# Altium PCB Schaltbox-Renault.PcbDoc
Units mm, origin at the board's own origin, x right, y up, seen from the top; angles counter-clockwise.
Board outline 189.6 x 139.6 mm, 2 copper layers (Top Layer, Bottom Layer); 114 components, 182 nets, 540 pads, 41 vias.
Unrouted connection lines stored in the file: 57.
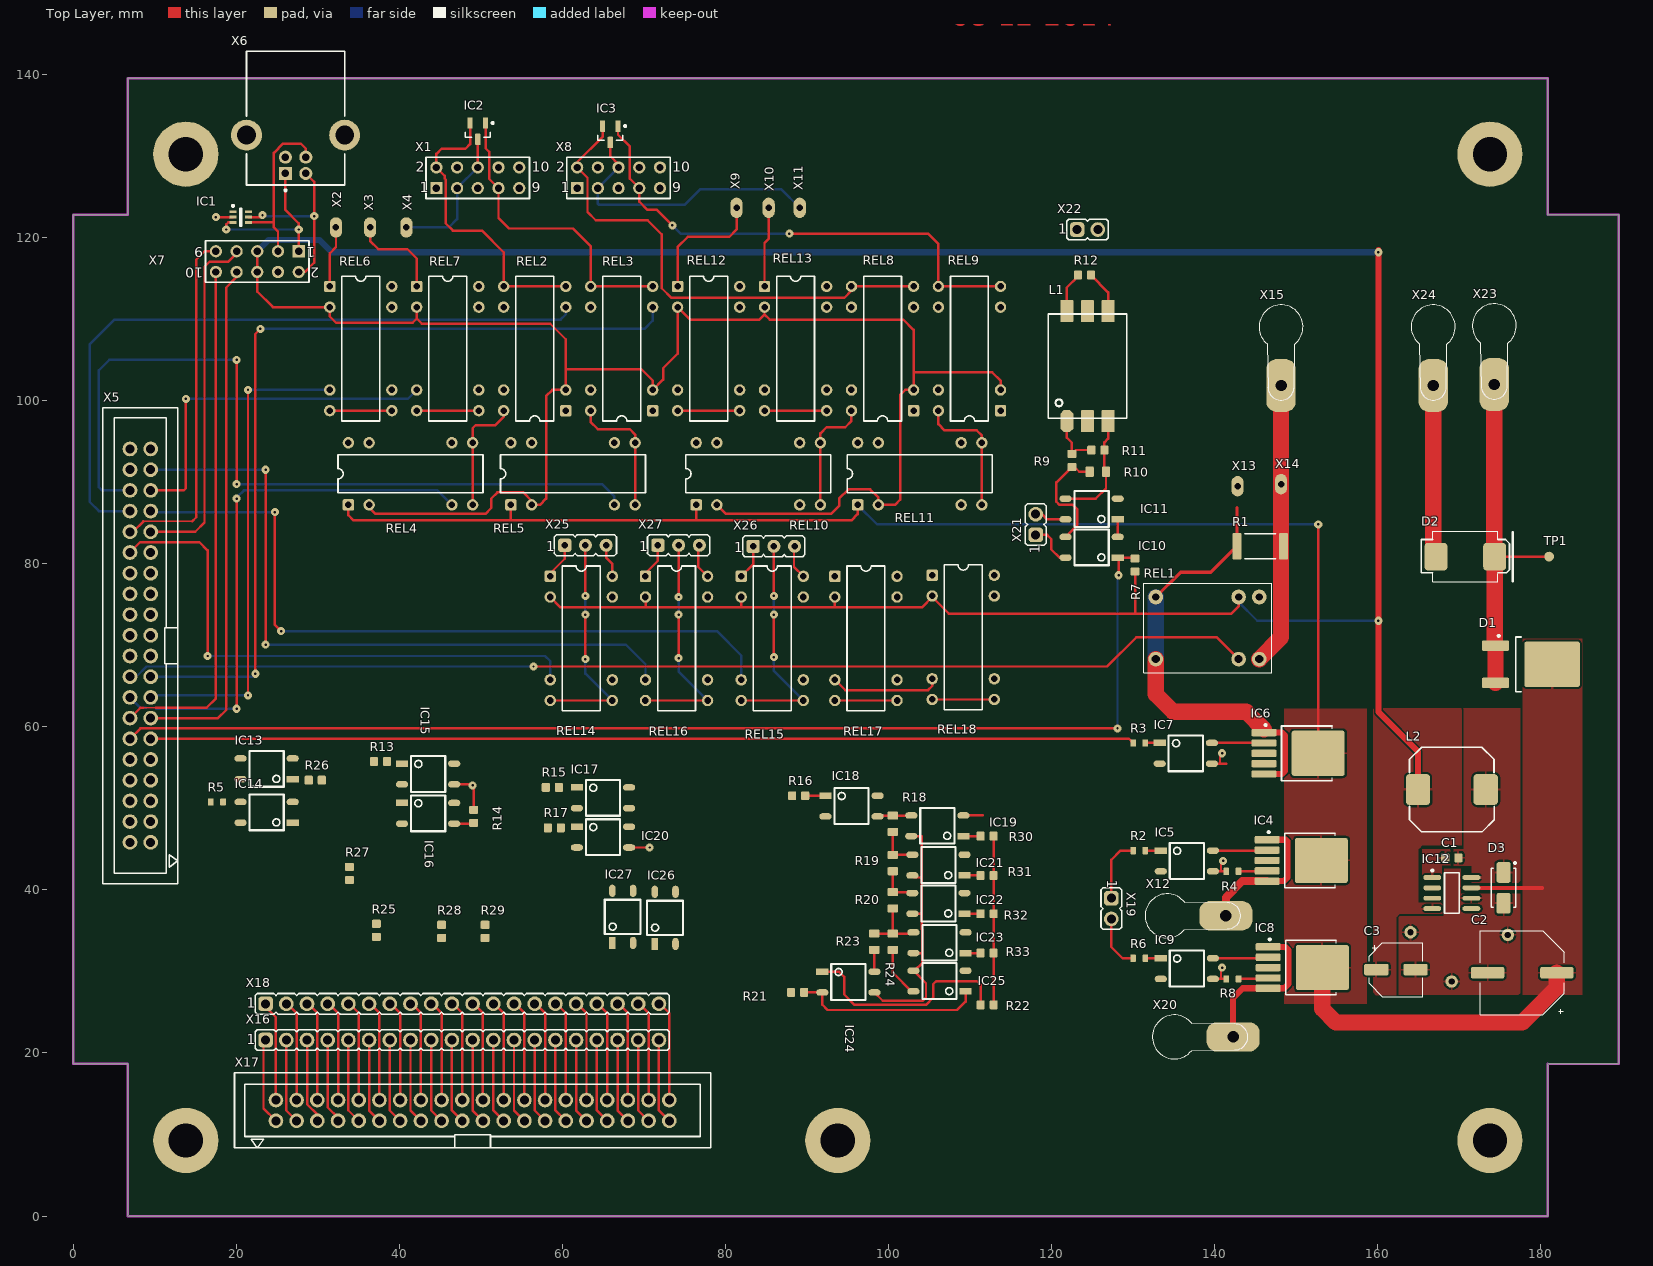
[diagram p0: Top Layer view]
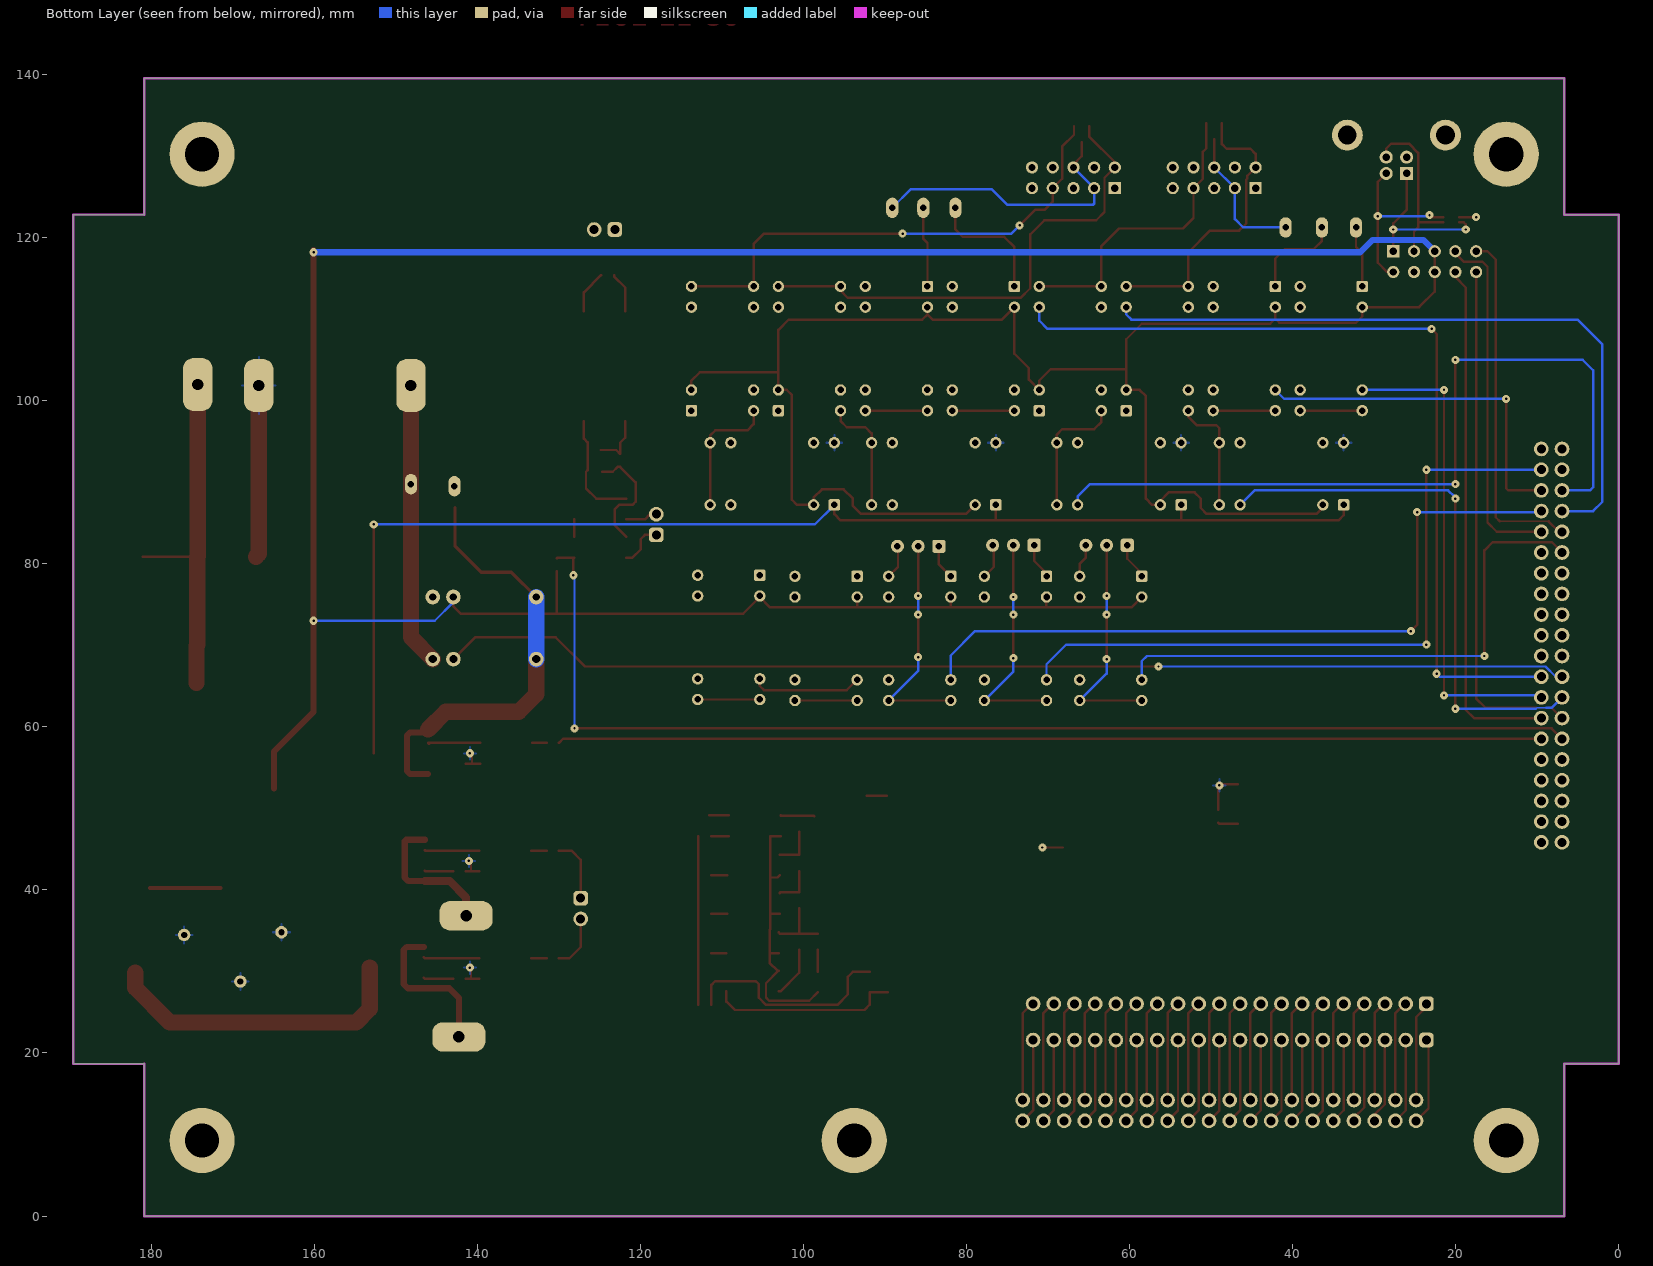
[diagram p1: Bottom Layer view, seen from below]
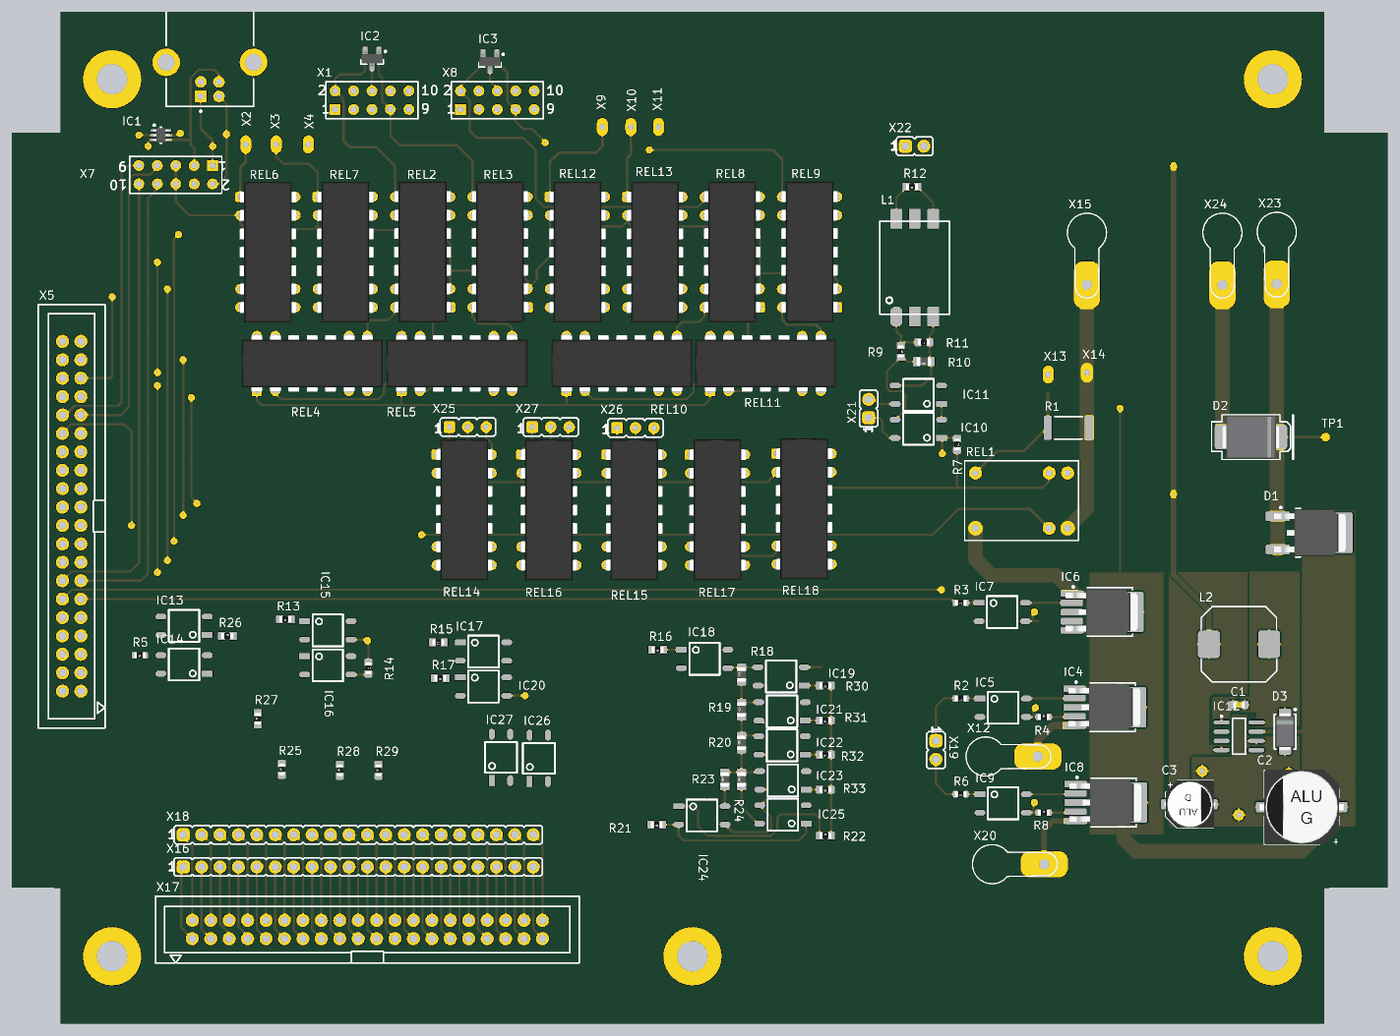
[diagram p2: 3D render of the assembled board from above, using the file's embedded part models]

## Layer stack, top to bottom
Top Solder: solder mask 0.0102, Solder Resist, Dk 3.5
Top Layer: signal copper 0.0356
Dielectric 1: dielectric 0.32, FR-4, Dk 4.8
Bottom Layer: signal copper 0.0356
Bottom Solder: solder mask 0.0102, Solder Resist, Dk 3.5

## Board outline
0.033,18.67 0.033,122.87 6.733,122.87 6.733,139.57 180.933,139.57 180.933,122.87 189.633,122.87 189.633,18.669 180.933,18.669 180.933,-0.03 6.733,-0.03 6.733,18.67

## Design rules (kind name [scope] priority, off if disabled: settings)
Clearance [All] p1: gap=0.2
PolygonConnect [All] p1: connectstyle=Relief reliefconductorwidth=0.254 reliefentries=4 polygonreliefangle="90 Angle" airgapwidth=0.254
RoutingVias [All] p1: holewidth=0.711 width=1.27 viastyle="Through Hole" minholewidth=0.711 minwidth=1.27 maxholewidth=0.711 maxwidth=1.27
SolderMaskExpansion [All] p1: expansion=0.102
Width [All] p1: maxlimit=2 minlimit=0.2 preferedwidth=0.3
29 further rules are at their usual default settings.

## Components (designator, comment, footprint, x,y, rotation, side; value= is the part's Value field where it differs from the comment)
C1 "10nF" C0603MD 169.164,43.942 r180 top
C2 "100µF / 63V" ALU-G 177.8,29.845 r0 top
C3 "68µF/16V Low ESW" ALU-D 162.306,30.226 r180 top
D1 "VS-MURB2020CTPBF" TO252-3_LD_(DPAK) 179.07,67.691 r0 top
D2 "SMCJ36A" SMC_MD_(DO214AB) 170.815,80.899 r0 top
D3 "10MQ060N" SMA_LD_(DO214AC) 175.514,40.259 r270 top
IC1 "PESD5V0L5UY" "SOT363_MD_(SC88 / SC70-6)" 20.574,122.555 r0 top
IC2 "PESD2CAN" SOT23_MD 49.657,133.096 r270 top
IC3 "PESD2CAN" SOT23_MD 65.913,132.715 r270 top
IC4 "BTS 433 P" TO252-5_MD_(DPAK) 150.749,43.624 r0 top
IC5 "ASSR-1410" SO-4 136.652,43.561 r0 top
IC6 "BTS 433 P" TO252-5_MD_(DPAK) 150.368,56.769 r0 top
IC7 "ASSR-1410" SO-4 136.525,56.769 r0 top
IC8 "BTS 433 P" TO252-5_MD_(DPAK) 150.876,30.48 r0 top
IC9 "ASSR-1410" SO-4 136.652,30.353 r0 top
IC10 "ASSR-1410" SO-4 124.968,82.042 r180 top
IC11 "ASSR-1410" SO-4 124.968,86.741 r180 top
IC12 "LM2672M-5.0" M08A_N 169.164,39.624 r0 top
IC13 "ASSR-1410" SO-4 23.749,54.864 r180 top
IC14 "ASSR-1410" SO-4 23.749,49.53 r180 top
IC15 "ASSR-1410" SO-4 43.561,54.229 r0 top
IC16 "ASSR-1410" SO-4 43.561,49.403 r0 top
IC17 "ASSR-1410" SO-4 65.024,51.308 r0 top
IC18 "ASSR-1410" SO-4 95.504,50.292 r0 top
IC19 "ASSR-1410" SO-4 106.045,47.879 r180 top
IC20 "ASSR-1410" SO-4 65.024,46.482 r0 top
IC21 "ASSR-1410" SO-4 106.172,43.053 r180 top
IC22 "ASSR-1410" SO-4 106.172,38.354 r180 top
IC23 "ASSR-1410" SO-4 106.299,33.528 r180 top
IC24 "ASSR-1410" SO-4 95.123,28.702 r0 top
IC25 "ASSR-1410" SO-4 106.299,28.829 r180 top
IC26 "ASSR-1410" SO-4 72.644,36.576 r90 top
IC27 "ASSR-1410" SO-4 67.437,36.703 r90 top
L1 "Uebertrager" SM-LP 124.46,104.267 r90 top
L2 "47uH" L_B82464-G4 169.164,52.324 r180 top
R1 "1R" R2512HD 145.669,82.169 r180 top
R2 "330R" R0603HD 130.81,44.831 r180 top
R3 "330R" R0603HD 130.81,58.039 r180 top
R4 "1k" R0603HD 142.24,42.291 r0 top
R5 "1k" R0603HD 17.653,50.8 r180 top
R6 "330R" R0603HD 130.81,31.623 r180 top
R7 "240R" R0603MD 130.302,79.883 r270 top
R8 "1k" R0603HD 142.24,29.083 r0 top
R9 "100R" R0603MD 122.555,92.71 r270 top
R10 "22R" R0805MD 125.73,91.313 r180 top
R11 "10R" R0603MD 125.73,93.98 r180 top
R12 "5k6" R0603MD 124.079,115.443 r180 top
R13 "330R" R0603MD 37.719,55.753 r180 top
R14 "1k5" R0603MD 49.149,49.022 r270 top
R15 "330R" R0603MD 58.801,52.578 r180 top
R16 "330R" R0603MD 89.027,51.562 r180 top
R17 "330R" R0603MD 59.055,47.625 r180 top
R18 "90R9" R0805MD 100.584,48.133 r90 top
R19 "110R" R0805MD 100.584,43.307 r90 top
R20 "185R" R0805MD 100.584,38.735 r90 top
R21 "330R" R0603MD 88.9,27.432 r180 top
R22 "330R" R0603MD 112.141,25.908 r0 top
R23 "10k85" R0805MD 98.298,33.655 r90 top
R24 "549R" R0805MD 100.584,33.655 r90 top
R25 "330R" R0603MD 37.211,35.052 r90 top
R26 "330R" R0603MD 29.718,53.467 r0 top
R27 "330R" R0603MD 33.909,42.037 r90 top
R28 "330R" R0603MD 45.212,34.925 r90 top
R29 "330R" R0603MD 50.546,34.925 r90 top
R30 "330R" R0603MD 112.141,46.609 r180 top
R31 "330R" R0603MD 112.141,41.783 r180 top
R32 "330R" R0603MD 112.141,37.084 r180 top
R33 "330R" R0603MD 112.141,32.258 r180 top
REL1 "Relay-HFD41" REL_HFD41 139.192,72.136 r0 top
REL2 "Relay-HE721" "DIP14 - HE700" 56.642,106.426 r180 top
REL3 "Relay-HE721" "DIP14 - HE700" 67.31,106.426 r180 top
REL4 "Relay-HE721" "DIP14 - HE700" 41.402,91.059 r90 top
REL5 "Relay-HE721" "DIP14 - HE700" 61.341,91.059 r90 top
REL6 "Relay-HE721" "DIP14 - HE700" 35.306,106.426 r0 top
REL7 "Relay-HE721" "DIP14 - HE700" 45.974,106.426 r0 top
REL8 "Relay-HE721" "DIP14 - HE700" 99.314,106.426 r180 top
REL9 "Relay-HE721" "DIP14 - HE700" 109.982,106.426 r180 top
REL10 "Relay-HE721" "DIP14 - HE700" 84.074,91.059 r90 top
REL11 "Relay-HE721" "DIP14 - HE700" 103.886,91.059 r90 top
REL12 "Relay-HE721" "DIP14 - HE700" 77.978,106.426 r0 top
REL13 "Relay-HE721" "DIP14 - HE700" 88.646,106.426 r0 top
REL14 "Relay-HE721" "DIP14 - HE700" 62.357,70.866 r0 top
REL15 "Relay-HE721" "DIP14 - HE700" 85.788,70.866 r0 top
REL16 "Relay-HE721" "DIP14 - HE700" 74.041,70.866 r0 top
REL17 "Relay-HE721" "DIP14 - HE700" 97.282,70.866 r0 top
REL18 "Relay-HE721" "DIP14 - HE700" 109.22,70.993 r0 top
TP1 "Testpoint" TESTPAD-1.2mm 181.102,80.899 r90 top
X1 "CAN Out 1" HDR2X5 44.577,126.111 r0 top
X2 "Anschlusspin" Loetpad_Oval_0.8 32.258,121.285 r90 top
X3 "Anschlusspin" Loetpad_Oval_0.8 36.449,121.285 r90 top
X4 "Anschlusspin" Loetpad_Oval_0.8 40.894,121.285 r90 top
X5 "PC I/O" SchneidKlemm_40 8.255,69.977 r90 top
X6 "USB-Hub in" USB_TypB 27.305,128.905 r90 top
X7 "USB_Hub Int" HDR2X5 27.686,118.364 r180 top
X8 "CAN Out 2" HDR2X5 61.849,126.111 r0 top
X9 "Anschlusspin" Loetpad_Oval_0.8 81.407,123.698 r270 top
X10 "Anschlusspin" Loetpad_Oval_0.8 85.344,123.698 r270 top
X11 "Anschlusspin" Loetpad_Oval_0.8 89.154,123.698 r270 top
X12 "UBout2" Loetoese-3.2 134.239,36.83 r0 top
X13 "I-" Loetpad_Oval_0.8 142.875,89.535 r270 top
X14 "I+" Loetpad_Oval_0.8 148.209,89.789 r270 top
X15 "KL 30" Loetoese-3.2 148.209,109.093 r270 top
X16 "Stifte 1x20" Stifte_1x20 47.752,21.59 r0 top
X17 "Cluster I/O" SchneidKlemm_40 49.022,12.954 r0 top
X18 "Stifte 1x20" Stifte_1x20 47.752,26.035 r0 top
X19 "UB Switch" Stifte_1x2 127.381,37.719 r270 top
X20 "UBout3" Loetoese-3.2 135.128,21.971 r0 top
X21 "LP in" Stifte_1x2 118.11,84.836 r90 top
X22 "Line Out" Stifte_1x2 124.46,121.031 r0 top
X23 "Vin" Loetoese-3.2 174.371,109.22 r270 top
X24 "GND" Loetoese-3.2 166.878,109.093 r270 top
X25 "Jumper-3" Buchse_1x3 62.865,82.296 r0 top
X26 "Jumper-3" Buchse_1x3 85.979,82.169 r0 top
X27 "Jumper-3" Buchse_1x3 74.295,82.296 r0 top

## Footprints (in the part's own frame and the unit in brackets; to place one, negate y for a bottom-side part, rotate by r counter-clockwise, add the part's x,y. Pads: shape width x height; smd on the part's side, far side on the other; paste and mask are expansions set on the pad)
ALU-D [mm] "Elko, Housing D,  body 6.6mm x 6.6mm, pad 3.0mm x 1.4mm"
  rrect30% 3x1.4 smd: N(-2.4,0) P(2.4,0)
  silkscreen extent -3.3,-3.3 3.3,3.3, body extent -3.6,-3.3 3.4,3.3, height 5.4
ALU-G [mm] "Elko, Housing G,  body 10.3mm x 10.3mm, d = 10mm"
  rrect30% 4.1x1.4 smd: N(-4.25,0) P(4.25,0)
  silkscreen extent -5.15,-5.15 5.15,5.15, body extent -5.8,-5.15 5.8,5.15, height 10.2
Buchse_1x3 [mm] "Buchsenleiste 3polig, RM2.54"
  rrect30% 1.6x1.6 hole 0.8: 1(-2.54,0)
  round 1.6 hole 0.8: 2(0,0) 3(2.54,0)
  silkscreen extent -3.81,-1.27 3.81,1.27, body extent -3.81,-1.27 3.81,1.27, height 7.2
C0603MD [mm] "Chip Capacitor, Body 1.6x0.8mm, IPC Medium Density"
  rrect30% 1x1.1 smd: 1(-0.8,0) 2(0.8,0)
  body extent -0.8,-0.4 0.8,0.4, height 0.3
"DIP14 - HE700" [mm] "Hamlin-HE700 DIL14"
  rrect30% 1.4x1.4 hole 0.8: 1(-3.81,7.62)
  round 1.4 hole 0.8: 2(-3.81,5.08) 6(-3.81,-5.08) 7(-3.81,-7.62) 8(3.81,-7.62) 9(3.81,-5.08) 13(3.81,5.08) 14(3.81,7.62)
  silkscreen extent -2.32,-8.89 2.33,8.89, body extent -3.9,-9.73 3.92,9.7, height 4.57
HDR2X5 [mm] "Connector; Header; 5x2 Position"
  rect 1.5x1.5 hole 0.9: 1(0,0)
  round 1.5 hole 0.9: 2(0,2.54) 3(2.54,0) 4(2.54,2.54) 5(5.08,0) 6(5.08,2.54) 7(7.62,0) 8(7.62,2.54) 9(10.16,0) 10(10.16,2.54)
  silkscreen extent -1.27,-1.27 11.43,3.81
L_B82464-G4 [mm] "Inductor EPCOS , Body 10.4x10.4mm, B82464-G4"
  rrect30% 3x3.8 smd: 1(-4.15,0) 2(4.15,0)
  silkscreen extent -5.2,-5.2 5.2,5.2, body extent -2.85,-2.5 2.85,2.5, height 4.8
Loetoese-3.2 [mm] "Lötöse M3"
  rrect70% 6.5x3.6 hole 1.4: 1(7.2,0)
  silkscreen extent -2.7,-2.7 9,2.7
Loetpad_Oval_0.8 [mm] "Lötpad oval 2.5x1.5, Bohrung o.8mm"
  oval 2.5x1.5 hole 0.8: 1(0,0)
M08A_N [mm] "SOIC, 8-Leads, Body 4.9x3.9mm, Pitch 1.27mm, IPC Medium Density"
  oval 2.2x0.6 smd: 1(-2.4,1.905) 2(-2.4,0.635) 3(-2.4,-0.635) 4(-2.4,-1.905) 5(2.4,-1.905) 6(2.4,-0.635) 7(2.4,0.635) 8(2.4,1.905)
  silkscreen extent -2.52,-2.5 0.9,2.88, body extent -2,-2.5 2,2.5, height 1.75
R0603HD [mm] "Chip Resistor, Body 1.6x0.8mm, IPC High Density"
  rrect30% 0.7x0.9 smd: 1(-0.75,0) 2(0.75,0)
  body extent -0.8,-0.4 0.8,0.4, height 0.3
R0603MD [mm] "Chip Resistor, Body 1.6x0.8mm, IPC High Density"
  rrect30% 1x1.1 smd: 1(-0.8,0) 2(0.8,0)
  body extent -0.8,-0.4 0.8,0.4, height 0.3
R0805MD [mm] "Chip Resistor, Body 2.0x1.3mm, IPC Medium Density"
  rrect30% 1x1.3 smd: 1(-1,0) 2(1,0)
  body extent -1,-0.62 1,0.63, height 0.78
R2512HD [mm] "Chip Resistor, Body 6.3x3.2mm, IPC High Density"
  rrect30% 1.1x3.3 smd: 1(-2.85,0) 2(2.85,0)
  silkscreen extent -1.9,-1.55 1.9,1.55, body extent -3.22,-1.68 3.22,1.68, height 0.71
REL_HFD41 [mm] "Relay HFD41-Serie, DPDT"
  round 1.8 hole 1: 1(-6.35,-3.81) 3(3.81,-3.81) 4(6.35,-3.81)
  round 1.8 hole 0.9: 5(6.35,3.81) 6(3.81,3.81) 8(-6.35,3.81)
  silkscreen extent -7.85,-5.5 7.85,5.5, body extent -7.85,-5.53 7.83,5.5, height 12
SchneidKlemm_40 [mm] "Schneid-Klemmsteckverbinder, 40pol. RM2.54"
  round 1.8 hole 1.1: 1(-24.13,-1.27) 2(-24.13,1.27) 3(-21.59,-1.27) 4(-21.59,1.27) 5(-19.05,-1.27) 6(-19.05,1.27) 7(-16.51,-1.27) 8(-16.51,1.27) 9(-13.97,-1.27) 10(-13.97,1.27) 11(-11.43,-1.27) 12(-11.43,1.27) 13(-8.89,-1.27) 14(-8.89,1.27) 15(-6.35,-1.27) 16(-6.35,1.27) 17(-3.81,-1.27) 18(-3.81,1.27) 19(-1.27,-1.27) 20(-1.27,1.27) 21(1.27,-1.27) 22(1.27,1.27) 23(3.81,-1.27) 24(3.81,1.27) 25(6.35,-1.27) 26(6.35,1.27) 27(8.89,-1.27) 28(8.89,1.27) 29(11.43,-1.27) 30(11.43,1.27) 31(13.97,-1.27) 32(13.97,1.27) 33(16.51,-1.27) 34(16.51,1.27) 35(19.05,-1.27) 36(19.05,1.27) 37(21.59,-1.27) 38(21.59,1.27) 39(24.13,-1.27) 40(24.13,1.27)
  silkscreen extent -29.21,-4.6 29.21,4.6
SM-LP [mm] "SM-LP-5001 Series -Surface Mount Line Matching Transformers"
  oct 2.7x1.6 smd: 1(-6.75,2.54)
  rrect10% 2.7x1.6 smd: 2(-6.75,0) 3(-6.75,-2.54) 4(6.75,-2.54) 5(6.75,0) 6(6.75,2.54)
  silkscreen extent -6.4,-4.8 6.4,4.8, body extent -6.4,-4.8 6.4,4.8, height 7.46
SMA_LD_(DO214AC) [mm] "Molded Diode, 2-Leads, Body 4,4x2,7mm, IPC Low Density"
  rrect30% 2.55x1.7 smd: 1(-1.9,0) 2(1.9,0)
  silkscreen extent -3.17,-1.5 2.4,1.53, body extent -2.6,-1.47 2.6,1.48, height 2.7
SMC_MD_(DO214AB) [mm] "DO-214-AB/SMC; 2 C-Bend Leads; Body 7.15 x 6.25mm"
  rrect30% 2.8x3.4 smd: 1(3.6,0) 2(-3.6,0)
  silkscreen extent -5.43,-3.1 5.8,3.1, body extent -3.98,-2.95 3.98,2.95, height 2.3
SO-4 [mm]
  rect 1.5x0.8 smd: 1(-3.2,1.27)
  oval 1.5x0.8 smd: 2(-3.2,-1.27) 3(3.2,-1.27) 4(3.2,1.27)
  silkscreen extent -2.1,-2.2 2.1,2.2, body extent -3.36,-2.2 3.36,2.2, height 3
SOT23_MD [mm] "SOT23, 3-Leads, Body 3,1x2,6mm (max), Pitch 0,95mm, IPC Medium Density"
  rrect30% 1.4x0.65 smd: 1(-1,0.95) 2(-1,-0.95) 3(1,0)
  silkscreen extent -1.12,-1.55 0.75,1.95, body extent -1.25,-1.56 1.23,1.56, height 1.3
"SOT363_MD_(SC88 / SC70-6)" [mm] "SOT323, 6-Leads, Body 2,2x2,4mm (max), Pitch 0,65mm, IPC Medium Density"
  rrect30% 0.9x0.35 smd: 1(-0.95,0.65) 2(-0.95,0) 3(-0.95,-0.65) 4(0.95,-0.65) 5(0.95,0) 6(0.95,0.65)
  silkscreen extent -1.07,-1.1 0.1,1.5, body extent -1.05,-1.1 1.05,1.1, height 1.1
Stifte_1x2 [mm] "Stiftleiste 2polig, RM2.54"
  rrect50% 1.8x1.8 hole 1.1: 1(-1.27,0)
  round 1.8 hole 1.1: 2(1.27,0)
  silkscreen extent -2.54,-1.27 2.54,1.27, body extent -2.54,-1.27 2.54,1.27, height 8.6
Stifte_1x20 [mm] "Stiftleiste 20polig, RM2.54"
  rrect50% 1.8x1.8 hole 1.1: 1(-24.13,0)
  round 1.8 hole 1.1: 2(-21.59,0) 3(-19.05,0) 4(-16.51,0) 5(-13.97,0) 6(-11.43,0) 7(-8.89,0) 8(-6.35,0) 9(-3.81,0) 10(-1.27,0) 11(1.27,0) 12(3.81,0) 13(6.35,0) 14(8.89,0) 15(11.43,0) 16(13.97,0) 17(16.51,0) 18(19.05,0) 19(21.59,0) 20(24.13,0)
  silkscreen extent -25.4,-1.27 25.4,1.27, body extent -25.4,-1.27 25.4,1.27, height 8.6
TESTPAD-1.2mm [mm] "Testpad 1.2mm"
  round 1.2 smd paste-2: 1(0,0)
TO252-3_LD_(DPAK) [mm] "TO252, IPC Low Density"
  rrect30% 3.35x1.3 smd: 1(-4.55,2.29) 3(-4.55,-2.29)
  rrect10% 6.8x5.6 smd: 4(2.4,0)
  silkscreen extent -4.27,-3.35 -1.4,3.61, body extent -5.1,-3.27 4.84,3.27, height 2.41
TO252-5_MD_(DPAK) [mm] "TO252, IPC Medium Density"
  rrect30% 3.05x0.9 smd: 1(-4.25,2.54) 2(-4.25,1.27) 3(-4.25,-0.005) 4(-4.25,-1.27) 5(-4.25,-2.54)
  rrect10% 6.5x5.55 smd: T(2.4,0)
  silkscreen extent -4.17,-3.35 4.13,3.59, body extent -5.1,-3.27 4.84,3.27, height 2.41
USB_TypB [mm] "Connector; USB2, Type B, Thru-Hole; 4 Position; Right Angle"
  round 3.8 hole 2.3: B1(3.71,6.02) B2(3.71,-6.02)
  round 1.6 hole 0.92: D+(1,-1.25) D-(-1,-1.25) GND(1,1.25)
  rect 1.6x1.6 hole 0.92: VBUS(-1,1.25)
  silkscreen extent -3.18,-6.02 13.99,6.02, body extent -2.41,-6.02 13.99,6.02, height 11.1

## Part data
C1: library part Cap, "Capacitor"
C2 C3: library part "Cap Pol", "Capacitor Polarized"
D1: library part MURD620CT, "Schottky Barrier Double Diode"
D2: "Suppressor Diode, unidirektional, 36V, 1500 W, fFotprint SMC"
D3: library part 10MQ060NPbF, "Schotky Diode 2,1A 60V, footprint SMA"
IC1: "ESD_Protection 5 Lines"
IC2 IC3: "ESD-Protection CAN-Bus"
IC4 IC6 IC8: library part "BTS443 P"
IC5 IC7 IC9 IC10 IC11 IC13 IC14 IC15 IC16 IC17 IC18 IC19 IC20 IC21 IC22 IC23 IC24 IC25 IC26 IC27: "Solid State Relay, (Photo MOSFET)"
IC12: "SIMPLE SWITCHER® Power Converter High Efficiency 1A Step-Down Voltage Regulator with Features, 8-pin Narrow SOIC"
L1: "SM-LP-5001 Series -Surface Mount Line Matching Transformers"
L2: library part Inductor, "Inductor"
R1 R2 R3 R4 R5 R6 R7 R8 R9 R10 R11 R12 R13 R14 R15 R16 R17 R18 R19 R20 R21 R22 R23 R24 R25 R26 R27 R28 R29 R30 R31 R32 R33: library part Res, "Resistor"
REL1: "Relay Hongfa Typ HFD41, SPDT, 2A/ 250VAC/30VDC"
REL2 REL3 REL4 REL5 REL6 REL7 REL8 REL9 REL10 REL11 REL12 REL13 REL14 REL15 REL16 REL17 REL18: "Hamlin Reed-Relay SPDT"
X1 X7 X8: library part "Header 5X2", "Header, 5-Pin, Dual row"
X2 X3 X4 X9 X10 X11: "Anschluss, Bohrung 1.2mm"
X5 X17: library part CON-40pol, "Schneid-Klemm-Verbinder 40pol"
X6: library part "USB-Typ AB", "USB-Stecker-Typ A und B,THT"
X12 X13 X14 X15 X20 X23 X24: library part Anschlusspin, "Anschluss, Bohrung 1.2mm"
X16 X18: "Stiftleiste, Buchsenleiste"
X19 X21 X22: library part Jumper-2, "2pol Jumper RM 2.54"
X25 X26 X27: "3pol Jumper RM 2.54"

## Free pads (board coordinates)
  round 8 hole 4.2: 0(13.833,9.27) 0(13.833,130.27) 0(93.833,9.27) 0(173.833,9.27) 0(173.833,130.27)
  round 1.524 hole 0.762: 0(164.092,34.815) 1(176.03,34.484) 2(169.147,28.769)

## Via types
v1: diameter 1, hole 0.3, Top Layer to Bottom Layer, 41 vias

## Nets (pads, with @x,y where several pads share a name; then routed paths per layer and width w, separated by ;. In a path a pad name is that pad's centre, name@x,y a point inside that pad or via, vN(x,y) a via of type N, cw(c..) or ccw(c..) an arc to the next point about the centre after c; other vN are vias at no path point)
+ADAC: IC18.4
-ADAC: IC19.4 IC21.4 IC22.4 IC23.4 IC24.3 IC25.3 | length 32.9
  Top Layer w0.3: IC24.3 99.339,26.416 104.267,26.416 104.648,26.797 104.648,28.55 IC25.3 103.242,30.099 104.199,31.056 104.199,32.131 ; IC19.4 104.14,46.609 104.14,41.529 ; IC22.4 104.013,37.084 104.14,36.957 ; IC21.4 103.226,41.529 104.14,41.529 ; IC23.4 104.072,32.258 104.199,32.131 ; 104.14,36.957 104.14,35.168 104.199,35.109 104.199,32.131 ; 104.14,36.957 104.14,41.529
ADAC: IC18.1 R16.1 | length 2.5
  Top Layer w0.3: R16.1 IC18.1
ADAC_E: IC24.2 IC25.1 R21.1 | length 23.2
  Top Layer w0.3: R21.1 IC24.2 91.923,25.933 92.583,25.273 108.458,25.273 109.499,26.314 IC25.1
BILD_BOX: REL15.6 X5.33 | length 91.1
  Top Layer w0.3: v1(24.765,86.36) 24.765,72.517 v1(25.527,71.755)
  Bottom Layer w0.3: X5.33 9.652,86.36 v1(24.765,86.36) ; v1@25.273,71.755 v1(25.527,71.755) 78.994,71.755 81.978,68.77 REL15.6
CAN1GND: IC2.3 X1.3 X1.6 X4.1 | length 17.5
  Top Layer w0.3: X1.6 IC2.3
  Bottom Layer w0.3: X4.1 46.101,121.285 47.117,122.301 X1.3 X1.6
CAN2GND: IC3.3 X8.3 X8.6 X11.1 | length 35.5
  Top Layer w0.3: IC3.3 65.913,130.048 66.929,129.032 X8.6
  Bottom Layer w0.3: X8.6 X8.3 64.389,124.206 64.516,124.079 75.057,124.079 76.962,125.984 86.868,125.984 X11.1
CANH1: REL7.1 X3.1 | length 11.7
  Top Layer w0.3: X3.1 36.449,119.634 37.465,118.618 41.021,118.618 42.164,117.475 REL7.1
CANH1-BREAK: REL7.6 X5.35 | length 44.3
  Top Layer w0.3: X5.35 13.589,89.027 13.843,89.281 v1(13.843,100.242)
  Bottom Layer w0.3: v1@13.755,100.242 v1(13.843,100.242) 41.06,100.242 REL7.6
CANH1-GND: REL5.6 X5.36 | length 99
  Top Layer w0.3: v1(20.066,89.789) v1(20.066,105.029)
  Bottom Layer w0.3: X5.36 3.556,89.027 3.175,89.408 3.175,103.759 4.445,105.029 v1(20.066,105.029) ; v1(20.066,89.789) 64.897,89.789 66.421,88.265 REL5.6
CANH1-OUT: IC2.1 REL3.7 REL3.8 X1.7 | length 37.6
  Top Layer w0.3: IC2.1 50.607,131.003 51.043,130.567 51.043,128.162 51.054,128.151 51.054,127.254 X1.7 52.197,122.428 53.467,121.158 61.341,121.158 63.5,118.999 REL3.8 REL3.7
CANH1-TO: REL3.6 X5.17 | length 106
  Top Layer w0.3: v1(22.367,66.533) 22.367,101.72 22.352,101.735 22.352,108.204 v1(22.987,108.839)
  Bottom Layer w0.3: X5.17 22.001,66.167 v1(22.367,66.533) ; v1@22.733,108.839 v1(22.987,108.839) 70.104,108.839 71.12,109.855 REL3.6
CANH2: REL13.1 X10.1 | length 9.9
  Top Layer w0.3: REL13.1 84.836,119.38 85.344,119.888 X10.1
CANH2-BREAK: REL13.6
CANH2-GND: REL11.6
CANH2-OUT: IC3.1 REL9.7 REL9.8 X8.7 | length 62
  Top Layer w0.3: IC3.1 66.863,132.654 68.315,131.202 68.315,128.162 68.326,128.151 68.326,127.254 X8.7 69.469,124.46 70.485,123.444 71.628,123.444 v1(73.533,121.539) ; v1(87.884,120.523) 104.902,120.523 106.172,119.253 REL9.8 REL9.7
  Bottom Layer w0.3: v1(73.533,121.539) 74.549,120.523 v1(87.884,120.523)
CANH2-TO: REL9.6
CANL1: REL6.1 X2.1 | length 7.6
  Top Layer w0.3: REL6.1 31.496,118.11 32.258,118.872 X2.1
CANL1-BREAK: REL6.6 X5.15 | length 59.5
  Top Layer w0.3: v1(21.463,63.881) v1(21.463,101.346)
  Bottom Layer w0.3: X5.15 9.779,63.881 v1(21.463,63.881) ; v1(21.463,101.346) REL6.6
CANL1-GND: REL4.6 X5.16 | length 66.8
  Top Layer w0.3: v1(20.066,62.23) v1(20.066,88.011)
  Bottom Layer w0.2: 8.906,62.341 10.044,62.341 10.155,62.23 10.226,62.23
  Bottom Layer w0.3: X5.16 8.271,62.341 8.906,62.341 ; 10.226,62.23 v1(20.066,62.23) ; v1@20.193,88.265 20.955,89.027 44.704,89.027 REL4.6
CANL1-OUT: IC2.2 REL2.7 REL2.8 X1.2 | length 36.6
  Top Layer w0.3: IC2.2 48.707,131.511 48.133,130.937 45.212,130.937 44.577,130.302 X1.2 45.593,127.635 45.593,127.304 45.731,127.166 45.731,121.782 46.609,120.904 50.165,120.904 52.832,118.237 REL2.8 REL2.7
CANL1-TO: REL2.6 X5.34 | length 85.6
  Bottom Layer w0.3: X5.34 3.175,86.487 2.032,87.63 2.032,106.934 5.08,109.982 59.817,109.982 60.452,110.617 REL2.6
CANL2: REL12.1 X9.1 | length 15.6
  Top Layer w0.3: REL12.1 74.168,118.872 75.438,120.142 80.518,120.142 81.407,121.031 X9.1
CANL2-BREAK: REL12.6
CANL2-GND: REL10.6
CANL2-OUT: IC3.2 REL8.7 REL8.8 X8.2 | length 61.5
  Top Layer w0.3: IC3.2 64.963,132.4 61.849,129.286 X8.2 63.119,127.381 63.119,123.19 64.135,122.174 70.485,122.174 72.224,120.435 72.224,113.831 73.406,112.649 94.615,112.649 95.504,113.538 REL8.8 REL8.7
CANL2-TO: REL8.6
"CENTRONIX 1": X16.1 X17.1 | length 10.7
  Top Layer w0.3: X16.1@23.368,21.717 23.368,13.208 X17.1
"CENTRONIX 2": X17.2 X18.1 | length 12.6
  Top Layer w0.3: X18.1@23.368,26.162 23.368,25.908 24.892,24.384 X17.2
"CENTRONIX 3": X16.2 X17.3 | length 10.7
  Top Layer w0.3: X16.2@25.908,21.717 26.142,21.483 26.142,12.974 X17.3
"CENTRONIX 4": X17.4 X18.2 | length 12.5
  Top Layer w0.3: X18.2@26.162,26.162 27.432,24.892 X17.4
"CENTRONIX 5": X16.3 X17.5 | length 10.6
  Top Layer w0.3: X16.3@28.702,21.717 28.722,21.697 28.722,13.706 29.972,12.456 X17.5
"CENTRONIX 6": X17.6 X18.3 | length 12.5
  Top Layer w0.3: X18.3@28.702,26.162 29.972,24.892 X17.6
"CENTRONIX 7": X16.4 X17.7 | length 10.6
  Top Layer w0.3: X16.4@31.242,21.717 31.242,13.335 32.512,12.065 X17.7
"CENTRONIX 8": X17.8 X18.4 | length 12.5
  Top Layer w0.3: X18.4@31.242,26.162 32.512,24.892 X17.8
"CENTRONIX 9": X16.5 X17.9 | length 10.6
  Top Layer w0.3: X16.5@33.782,21.717 33.762,21.697 33.762,12.974 X17.9
"CENTRONIX 10": X17.10 X18.5 | length 12.5
  Top Layer w0.3: X18.5@33.782,26.162 35.052,24.892 X17.10
"CENTRONIX 11": X16.6 X17.11 | length 10.6
  Top Layer w0.3: X16.6@36.322,21.717 36.322,12.954 X17.11
"CENTRONIX 12": X17.12 X18.6 | length 12.5
  Top Layer w0.3: X18.6@36.322,26.162 37.592,24.892 X17.12
"CENTRONIX 13": X16.7 X17.13 | length 10.6
  Top Layer w0.3: X16.7@38.862,21.717 38.862,12.954 X17.13
"CENTRONIX 14": X17.14 X18.7 | length 12.5
  Top Layer w0.3: X18.7@38.862,26.162 40.132,24.892 X17.14
"CENTRONIX 15": X16.8 X17.15 | length 10.6
  Top Layer w0.3: X16.8@41.402,21.717 41.402,12.954 X17.15
"CENTRONIX 16": X17.16 X18.8 | length 12.5
  Top Layer w0.3: X18.8@41.402,26.162 42.672,24.892 X17.16
"CENTRONIX 17": X16.9 X17.17 | length 10.6
  Top Layer w0.3: X16.9@43.942,21.717 43.942,12.954 X17.17
"CENTRONIX 18": X17.18 X18.9 | length 12.5
  Top Layer w0.3: X18.9@43.942,26.162 45.212,24.892 X17.18
"CENTRONIX 19": X16.10 X17.19 | length 10.6
  Top Layer w0.3: X16.10@46.482,21.717 46.482,12.954 X17.19
"CENTRONIX 20": X17.20 X18.10 | length 12.5
  Top Layer w0.3: X18.10@46.482,26.162 47.752,24.892 X17.20
"CENTRONIX 21": X16.11 X17.21 | length 10.6
  Top Layer w0.3: X16.11@49.022,21.717 49.022,12.954 X17.21
"CENTRONIX 22": X17.22 X18.11 | length 12.5
  Top Layer w0.3: X18.11@49.022,26.162 50.292,24.892 X17.22
"CENTRONIX 23": X16.12 X17.23 | length 10.6
  Top Layer w0.3: X16.12@51.562,21.717 51.562,12.954 X17.23
"CENTRONIX 24": X17.24 X18.12 | length 12.5
  Top Layer w0.3: X18.12@51.562,26.162 52.832,24.892 X17.24
"CENTRONIX 25": X16.13 X17.25 | length 10.6
  Top Layer w0.3: X16.13@54.102,21.717 54.102,12.954 X17.25
"CENTRONIX 26": X17.26 X18.13 | length 12.5
  Top Layer w0.3: X18.13@54.102,26.162 55.372,24.892 X17.26
"CENTRONIX 27": X16.14 X17.27 | length 10.6
  Top Layer w0.3: X16.14@56.642,21.717 56.642,12.954 X17.27
"CENTRONIX 28": X17.28 X18.14 | length 12.5
  Top Layer w0.3: X18.14@56.642,26.162 57.912,24.892 X17.28
"CENTRONIX 29": X16.15 X17.29 | length 10.6
  Top Layer w0.3: X16.15@59.182,21.717 59.182,12.954 X17.29
"CENTRONIX 30": X17.30 X18.15 | length 12.5
  Top Layer w0.3: X18.15@59.182,26.162 60.452,24.892 X17.30
"CENTRONIX 31": X16.16 X17.31 | length 10.6
  Top Layer w0.3: X16.16@61.722,21.717 61.722,12.954 X17.31
"CENTRONIX 32": X17.32 X18.16 | length 12.5
  Top Layer w0.3: X18.16@61.722,26.162 62.992,24.892 X17.32
"CENTRONIX 33": X16.17 X17.33 | length 10.6
  Top Layer w0.3: X16.17@64.262,21.717 64.262,12.954 X17.33
"CENTRONIX 34": X17.34 X18.17 | length 12.5
  Top Layer w0.3: X18.17@64.262,26.162 65.532,24.892 X17.34
"CENTRONIX 35": X16.18 X17.35 | length 10.6
  Top Layer w0.3: X16.18@66.802,21.717 66.802,12.954 X17.35
"CENTRONIX 36": X17.36 X18.18 | length 12.5
  Top Layer w0.3: X18.18@66.802,26.162 68.072,24.892 X17.36
"CENTRONIX 37": X16.19 X17.37 | length 10.6
  Top Layer w0.3: X16.19@69.342,21.717 69.342,12.954 X17.37
"CENTRONIX 38": X17.38 X18.19 | length 12.5
  Top Layer w0.3: X18.19@69.342,26.162 70.612,24.892 X17.38
"CENTRONIX 39": X16.20 X17.39 | length 10.6
  Top Layer w0.3: X16.20@71.882,21.717 71.882,12.954 X17.39
"CENTRONIX 40": X17.40 X18.20 | length 12.5
  Top Layer w0.3: X18.20@71.882,26.162 73.152,24.892 X17.40
DAY/NIGHT: IC20.1 R17.1
DAY/NIGHT-NC: IC20.4
ECOM0: X5.9
ECOM1: X5.28
FLASH_REL: REL14.6 X5.30 | length 68
  Top Layer w0.3: X5.30 8.235,82.657 15.514,82.657 16.51,81.661 v1(16.51,68.707)
  Bottom Layer w0.3: v1(16.51,68.707) 57.912,68.707 58.547,68.072 REL14.6
GND: C2.N C3.N D2.2 D3.2 IC5.3 IC7.3 IC9.3 IC12.6 IC13.3 IC14.3 IC15.3 IC20.3 pad.0@164.092,34.815 pad.1 pad.2 R4.1 R5.1 R8.1 R14.1 REL4.14 REL5.14 REL10.14 REL11.14 X24.1 | length 37.7
  Top Layer w0.3: IC15.3 48.895,52.959 49.149,52.705 R14.1 ; IC20.3 v1(70.739,45.212) ; IC7.3 140.716,55.499 ; IC9.3 140.843,29.083 ; IC5.3 140.843,42.291 ; v1@140.716,56.769 140.716,55.499 ; v1@140.843,30.226 140.843,29.083 ; v1@140.843,43.561 140.843,42.291 ; R8.1 140.843,29.083 ; R4.1 140.843,42.291 ; 141.49,55.499 140.716,55.499
  Top Layer w2: X24.1@166.878,101.854 166.878,81.236 D2.2
  other v1: 140.97,30.48 141.097,43.561 49.022,52.832 140.97,56.769
"IDI 0": X5.1
"IDI 1": X5.20
"IDI 2": X5.2
"IDI 3": X5.21
"IDI 4": X5.3
"IDI 5": X5.22
"IDI 6": X5.4
"IDI 7": X5.23
"IDI 8": X5.5
"IDI 9": X5.24
"IDI 10": X5.6
"IDI 11": X5.25
"IDI 12": X5.7
"IDI 13": X5.26
"IDI 14": X5.8
"IDI 15": X5.27
"IDO 15": REL16.6 X5.37 | length 85.1
  Top Layer w0.3: v1(23.622,70.104) v1(23.622,91.567)
  Bottom Layer w0.3: X5.37 v1(23.622,91.567) ; v1(23.622,70.104) 67.818,70.104 70.231,67.691 REL16.6
"KL 30 ON": R3.2 X5.11 | length 120.7
  Top Layer w0.3: X5.11 129.552,58.547 R3.2
NetC1_1: C1.1 D3.1 IC12.8 L2.1
NetC1_2: C1.2 IC12.1
NetD1_1: D1.1 D1.3 D2.1 TP1.1 X23.1 | length 43.3
  Top Layer w0.3: D2.1 TP1.1
  Top Layer w2: X23.1@174.371,101.981 174.371,80.943 D2.1 174.415,70.086 D1.1 D1.3
NetIC1_4: IC1.4 X6.D+ X7.3 | length 21.1
  Top Layer w0.3: IC1.4 24.623,121.905 24.638,121.92 ; X7.3 25.146,120.777 24.638,121.285 24.638,121.92 ; X6.D+ 28.555,130.957 27.94,131.572 25.781,131.572 24.638,130.429 24.638,121.92
NetIC1_5: IC1.5 X6.D- X7.2 | length 22
  Top Layer w0.3: IC1.5 22.987,122.555 v1(23.241,122.809) ; X7.2 28.448,115.824 29.591,116.967 v1(29.591,122.682) 29.591,126.869 X6.D-
  Bottom Layer w0.3: v1(23.241,122.809) 23.368,122.682 v1(29.591,122.682)
NetIC4_2: IC4.2 IC5.4 | length 6.7
  Top Layer w0.3: IC5.4 146.435,44.831 IC4.2
NetIC4_4: IC4.4 R4.2 | length 3.5
  Top Layer w0.3: R4.2 146.436,42.291 IC4.4
NetIC5_1: IC5.1 R2.1 | length 1.9
  Top Layer w0.3: R2.1 IC5.1
NetIC6_1: IC6.1 IC6.5 R1.2 REL1.1 REL1.8 X13.1 | length 54.1
  Top Layer w0.4: REL1.8 135.89,78.994 139.573,78.994 142.819,82.24 142.819,86.924
  Top Layer w0.75: IC6.5 148.336,54.229 148.717,54.61 148.717,58.928 148.336,59.309 IC6.1
  Top Layer w2: REL1.1 132.842,64.008 135.001,61.849 143.958,61.849 IC6.1@146.118,59.689
  Bottom Layer w2: REL1.1 REL1.8
NetIC6_2: IC6.2 IC7.4 | length 6.6
  Top Layer w0.3: IC7.4 IC6.2 IC6.2@145.991,57.912
NetIC6_4: IC6.4 R5.2
NetIC7_1: IC7.1 R3.1 | length 1.8
  Top Layer w0.3: R3.1 IC7.1
NetIC8_2: IC8.2 IC9.4 | length 6.8
  Top Layer w0.3: IC9.4 146.499,31.623 IC8.2
NetIC8_4: IC8.4 R8.2 | length 3.7
  Top Layer w0.3: R8.2 146.499,29.083 IC8.4
NetIC9_1: IC9.1 R6.1 | length 1.9
  Top Layer w0.3: R6.1 IC9.1
NetIC10_2: IC10.2 IC11.1 | length 2.2
  Top Layer w0.3: IC10.2 IC11.1
NetIC10_3: IC10.3 R9.2 R10.2 | length 14.4
  Top Layer w0.3: IC10.3 123.19,84.734 123.19,86.741 122.682,87.249 121.031,87.249 120.65,87.63 120.65,90.005 R9.2 122.847,91.91 123.444,91.313 R10.2
NetIC10_4: IC10.4 X21.1 | length 5.6
  Top Layer w0.3: X21.1 119.507,83.566 120.015,83.058 120.015,81.788 121.031,80.772 IC10.4
NetIC11_3: IC11.3 L1.3 R10.1 R11.1 | length 14
  Top Layer w0.3: IC11.3 125.476,88.011 126.73,89.265 R10.1 126.53,91.513 R11.1 126.53,94.907 127,95.377 L1.3
NetIC11_4: IC11.4 X21.2 | length 3.9
  Top Layer w0.3: X21.2 118.872,86.106 119.507,85.471 IC11.4
NetIC13_1: IC13.1 R26.1
NetIC14_1: IC14.1 R29.1
NetIC15_1: IC15.1 R13.1
NetIC16_3: IC16.3 R14.2 | length 2.4
  Top Layer w0.3: IC16.3 49.06,48.133 R14.2
NetIC18_3: IC18.3 IC19.3 R18.2 | length 4.2
  Top Layer w0.3: IC18.3 98.815,49.133 R18.2 102.829,49.133 IC19.3
NetIC19_1: IC19.1 R30.2 | length 2.1
  Top Layer w0.3: IC19.1 R30.2
NetIC21_1: IC21.1 R31.2 | length 2
  Top Layer w0.3: IC21.1 R31.2
NetIC21_3: IC21.3 R18.1 R19.2 | length 5.2
  Top Layer w0.3: R18.1 R19.2 102.956,44.307 IC21.3
NetIC22_1: IC22.1 R32.2 | length 2
  Top Layer w0.3: IC22.1 R32.2
NetIC22_3: IC22.3 R19.1 R20.2 | length 5
  Top Layer w0.3: R19.1 R20.2 102.861,39.735 IC22.3
NetIC23_1: IC23.1 R33.2 | length 1.8
  Top Layer w0.3: IC23.1 R33.2
NetIC23_3: IC23.3 R20.1 R23.2 R24.2 | length 7.9
  Top Layer w0.3: R23.2 R24.2 ; R20.1 R24.2 ; IC23.3 102.956,34.655 R24.2
NetIC24_1: IC24.1 R22.1 | length 27.2
  Top Layer w0.3: IC24.1 93.98,29.972 94.615,29.337 94.615,27.178 95.885,25.908 104.648,25.908 105.537,26.797 105.537,28.448 105.918,28.829 110.871,28.829 111.341,28.359 R22.1
NetIC24_4: IC24.4 R23.1 | length 2.7
  Top Layer w0.3: R23.1 98.298,29.997 IC24.4
NetIC25_4: IC25.4 R24.1 | length 6.3
  Top Layer w0.3: R24.1 100.584,29.845 102.87,27.559 IC25.4
NetIC27_1: IC27.1 R27.1
NetL1_1: L1.1 R9.1 R11.2 | length 6.8
  Top Layer w0.3: L1.1 121.92,95.504 122.555,94.869 R9.1 123.025,93.98 R11.2
NetL1_4: L1.4 R12.1 X22.2 | length 5.3
  Top Layer w0.3: R12.1 127,113.322 L1.4
NetL1_6: L1.6 R12.2 X22.1 | length 5
  Top Layer w0.3: L1.6 121.92,113.919 123.279,115.278 R12.2
NetR2_2: R2.2 X19.1 | length 7.9
  Top Layer w0.3: X19.1 127.381,43.688 128.524,44.831 R2.2
NetR6_2: R6.2 X19.2 | length 6.7
  Top Layer w0.3: X19.2 127.381,33.02 128.778,31.623 R6.2
NetREL2_1: REL2.1 REL6.7 REL6.8 | length 7.6
  Top Layer w0.3: REL6.7 REL6.8
NetREL2_14: REL2.14 REL4.7 REL4.8 | length 14.5
  Top Layer w0.3: REL4.7 REL4.8 49.022,96.647 49.403,97.028 51.816,97.028 52.832,98.044 REL2.14
NetREL3_1: REL3.1 REL7.7 REL7.8 | length 7.6
  Top Layer w0.3: REL7.7 REL7.8
NetREL3_14: REL3.14 REL5.7 REL5.8 | length 16.1
  Top Layer w0.3: REL3.14 63.5,97.409 64.389,96.52 68.326,96.52 68.961,95.885 REL5.8 REL5.7
NetREL8_1: REL8.1 REL12.7 REL12.8 | length 7.6
  Top Layer w0.3: REL12.7 REL12.8
NetREL8_14: REL8.14 REL10.7 REL10.8 | length 14.5
  Top Layer w0.3: REL10.7 REL10.8 91.694,96.012 92.456,96.774 94.742,96.774 95.504,97.536 REL8.14
NetREL9_1: REL9.1 REL13.7 REL13.8 | length 7.6
  Top Layer w0.3: REL13.7 REL13.8
NetREL9_14: REL9.14 REL11.7 REL11.8 | length 16.1
  Top Layer w0.3: REL9.14 106.172,97.155 106.934,96.393 110.871,96.393 111.506,95.758 REL11.8 REL11.7
NetREL14_1: REL14.1 X25.1 | length 4.5
  Top Layer w0.3: REL14.1 58.547,78.867 60.325,80.645 X25.1
NetREL14_7: REL14.7 REL14.8 X25.2 | length 28.3
  Top Layer w0.3: REL14.7 REL14.8 ; v1(62.865,68.326) v1(62.865,73.787) ; v1@62.865,75.819 v1(62.865,76.073) X25.2
  Bottom Layer w0.3: v1(62.865,68.326) 62.865,66.548 REL14.8 ; v1(62.865,73.787) v1(62.865,76.073)
NetREL14_14: REL14.14 X25.3 | length 4.1
  Top Layer w0.3: X25.3 65.405,80.772 66.167,80.01 REL14.14
NetREL15_1: REL15.1 X26.1 | length 4.3
  Top Layer w0.3: REL15.1 83.439,79.947 X26.1
NetREL15_7: REL15.7 REL15.8 X26.2 | length 28
  Top Layer w0.3: REL15.7 REL15.8 ; v1(85.979,68.58) v1(85.979,73.787) ; v1(85.979,76.073) X26.2
  Bottom Layer w0.3: v1(85.979,68.58) 85.979,66.865 REL15.8 ; v1(85.979,73.787) v1(85.979,76.073)
NetREL15_14: REL15.14 X26.3 | length 4.2
  Top Layer w0.3: X26.3 88.456,82.105 88.456,79.629 REL15.14
NetREL16_1: REL16.1 X27.1 | length 4.4
  Top Layer w0.3: REL16.1 70.231,78.867 71.755,80.391 X27.1
NetREL16_7: REL16.7 REL16.8 X27.2 | length 28.1
  Top Layer w0.3: REL16.7 REL16.8 ; v1(74.295,68.453) v1(74.295,73.787) ; v1(74.295,75.946) X27.2
  Bottom Layer w0.3: v1(74.295,68.453) 74.295,66.802 REL16.8 ; v1(74.295,73.787) v1(74.295,75.946)
NetREL16_14: REL16.14 X27.3 | length 4.3
  Top Layer w0.3: X27.3 76.708,82.169 76.708,79.629 REL16.14
NetREL17_7: REL17.7 REL17.8 | length 7.6
  Top Layer w0.3: REL17.7 REL17.8
NetREL18_7: REL18.7 REL18.8 | length 7.6
  Top Layer w0.3: REL18.7 REL18.8
NIVCOD: IC15.4 IC16.4
NIVCOD_GND: IC15.2
NIVCOD_RES: IC16.1 R28.1
NORMCLOSE: IC26.1 R25.1
NORMOPEN: IC27.2
OUT1: R1.1 REL1.4 X14.1 X15.1 | length 34.6
  Top Layer w2: REL1.4 148.209,70.993 X15.1@148.209,101.854
OUT2: IC4.1 IC4.5 X12.1 | length 17.8
  Top Layer w0.75: IC4.5 148.526,41.084 148.971,41.529 148.971,45.974 148.78,46.164 IC4.1
  Top Layer w1: X12.1 141.439,39.077 143.446,41.084 IC4.5
OUT3: IC8.1 IC8.5 X20.1 | length 19.1
  Top Layer w0.75: X20.1 142.328,26.758 143.51,27.94 IC8.5 148.59,27.94 149.098,28.448 149.098,32.639 148.717,33.02 IC8.1
"PARKING BREAK": IC13.2
"PARKING BREAK-NO": IC13.4
PCGND: IC1.2 IC5.2 IC7.2 IC9.2 IC11.2 IC16.2 IC17.2 IC18.2 IC20.2 IC25.2 IC26.2 X5.29 X6.B1 X6.B2 X6.GND X7.4 | length 2.1
  Top Layer w0.3: v1(17.526,122.555) IC1.2
PCOM0: X5.10
PCOM1: X5.19
PWM-IN: REL17.6 REL18.6 | length 13.6
  Top Layer w0.3: REL17.6 94.742,64.516 104.902,64.516 105.41,65.024 REL18.6
S1: IC19.2 | length 2.4
  Top Layer w0.3: IC19.2 111.633,49.149
S2: IC21.2
S3: IC22.2
S4: IC23.2
SHUNT: REL1.3 X5.18 | length 139.1
  Top Layer w0.3: v1(56.495,67.417) 126.869,67.417 130.445,70.993 140.335,70.993 REL1.3
  Bottom Layer w0.3: X5.18 7.757,66.167 9.007,67.417 v1(56.495,67.417)
SOUND: IC10.1 R7.1 X5.12 | length 145.1
  Top Layer w0.3: X5.12 8.255,59.817 v1(128.143,59.817) ; v1(128.27,78.613) 128.27,80.67 IC10.1 130.213,80.772 R7.1
  Bottom Layer w0.3: v1(128.143,59.817) v1@128.143,78.867
SRB: IC17.1 R15.1
SRB-NC: IC17.4
UB+: C2.P D1.4 IC4.T IC6.T IC8.T IC12.7 REL4.1 REL5.1 REL10.1 REL11.1 | length 201.7
  Top Layer w0.3: REL4.1 33.782,85.979 34.417,85.344 53.594,85.344 ; REL5.1 53.721,85.471 53.594,85.344 ; REL10.1 76.454,85.344 ; REL11.1 96.266,86.106 95.504,85.344 76.454,85.344 ; IC6.T v1(152.768,84.849) ; 53.594,85.344 76.454,85.344
  Top Layer w0.5: IC12.7 180.213,40.259
  Top Layer w2: IC8.T 153.276,25.413 154.94,23.749 177.8,23.749 182.05,27.999 C2.P
  Bottom Layer w0.3: REL11.1 98.666,84.849 v1(152.768,84.849)
USB_1: X5.31 X7.7 | length 43.3
  Top Layer w0.3: X5.31 14.986,83.947 16.129,85.09 16.129,116.459 16.764,117.094 19.05,117.094 20.066,118.11 X7.7
USB_2: X5.13 X7.8 | length 63.9
  Top Layer w0.3: X5.13 17.78,61.087 18.796,62.103 18.796,113.919 20.066,115.189 X7.8
USB_3: X5.32 X7.9 | length 43.3
  Top Layer w0.2: 8.636,85.217 14.605,85.217
  Top Layer w0.3: X5.32 7.366,83.947 8.636,85.217 ; 14.605,85.217 15.113,85.725 15.113,117.348 16.129,118.364 X7.9
USB_4: X5.14 X7.10 | length 63.9
  Top Layer w0.2: 8.636,62.357 10.16,62.357
  Top Layer w0.3: X5.14 8.255,62.357 8.636,62.357 ; 10.16,62.357 16.383,62.357 17.526,63.5 X7.10
V5: C3.P IC12.4 IC17.3 L2.2 R7.2 R13.2 R15.2 R16.2 R17.2 R21.2 R22.2 R25.2 R26.2 R27.2 R28.2 R29.2 R30.1 R31.1 R32.1 R33.1 REL1.6 REL2.2 REL3.2 REL4.2 REL5.2 REL6.2 REL7.2 REL8.2 REL9.2 REL10.2 REL11.2 REL12.2 REL13.2 REL14.2 REL15.2 REL16.2 REL17.2 REL18.2 X7.5 X7.6 | length 553.5
  Top Layer w0.3: X7.5 X7.6 22.606,113.411 24.511,111.506 REL6.2 31.496,110.363 32.258,109.601 41.656,109.601 42.164,110.109 ; REL4.2 36.322,86.946 37.123,86.145 50.585,86.145 51.308,86.868 51.308,88.011 52.07,88.773 55.245,88.773 56.261,87.757 REL5.2 57.277,87.249 58.039,88.011 58.039,100.584 58.801,101.346 REL2.2 60.452,103.886 ; REL7.2 42.164,110.109 ; REL14.2 59.817,74.676 81.978,74.676 ; 70.263,74.771 REL16.2@70.263,75.946 ; REL10.2 80.098,86.145 93.003,86.145 93.98,87.122 93.98,88.011 95.123,89.154 97.79,89.154 98.806,88.138 REL11.2 100.838,87.249 101.473,87.884 101.473,100.711 102.108,101.346 REL8.2 103.124,103.505 ; REL15.2 81.978,74.676 ; REL13.2 84.836,110.617 ; REL17.2 93.472,74.676 ; R22.2 R33.1 R32.1 R31.1 R30.1 ; REL9.2 113.792,102.489 112.776,103.505 103.124,103.505 ; R7.2 130.302,73.914 ; REL1.6 143.002,74.803 142.113,73.914 130.302,73.914 ; 42.164,110.109 42.799,109.474 58.547,109.474 60.452,107.569 60.452,103.886 ; 60.452,103.886 69.723,103.886 71.12,102.489 REL3.2 72.39,102.616 72.39,104.013 74.168,105.791 REL12.2 75.692,109.982 84.201,109.982 84.836,110.617 ; 81.978,74.676 93.472,74.676 ; 84.836,110.617 85.471,109.982 101.854,109.982 103.124,108.712 103.124,103.505 ; 93.472,74.676 104.14,74.676 105.41,75.946 107.442,73.914 128.27,73.914 130.302,73.914
  Top Layer w0.75: v1@160.147,118.491 v1(160.147,118.237) v1(160.147,73.025) 160.147,61.849 165.014,56.982 L2.2@165.014,52.451
  Bottom Layer w0.3: REL1.6 143.002,75.311 145.288,73.025 v1(160.147,73.025)
  Bottom Layer w0.75: X7.5 24.003,119.761 30.226,119.761 31.75,118.237 v1(160.147,118.237)
VBUS1: IC1.3 X6.VBUS X7.1 | length 20.7
  Top Layer w0.3: v1(18.796,121.031) 18.796,121.666 19.035,121.905 IC1.3 ; X6.VBUS 26.055,123.424 27.686,121.793 v1(27.686,121.031) X7.1
  Bottom Layer w0.3: v1(18.796,121.031) v1(27.686,121.031)
WASHER: IC14.2
WASHER-NO: IC14.4
pads on no net: IC1.1 IC1.6 IC4.3 IC6.3 IC8.3 IC12.2 IC12.3 IC12.5 IC26.3 IC26.4 IC27.3 IC27.4 L1.2 L1.5 REL1.5 REL2.9 REL2.13 REL3.9 REL3.13 REL4.9 REL4.13 REL5.9 REL5.13 REL6.9 REL6.13 REL6.14 REL7.9 REL7.13 REL7.14 REL8.9 REL8.13 REL9.9 REL9.13 REL10.9 REL10.13 REL11.9 REL11.13 REL12.9 REL12.13 REL12.14 REL13.9 REL13.13 REL13.14 REL14.9 REL14.13 REL15.9 REL15.13 REL16.9 REL16.13 REL17.1 REL17.9 REL17.13 REL17.14 REL18.1 REL18.9 REL18.13 REL18.14 X1.1 X1.4 X1.5 X1.8 X1.9 X1.10 X5.38 X5.39 X5.40 X8.1 X8.4 X8.5 X8.8 X8.9 X8.10

## Polygon pours and split planes (outlines as drawn)
UB+ on Top Layer "Ubat" (solid, pour order 9): 158.75,62.23 148.59,62.23 148.59,26.035 158.75,26.035
V5 on Top Layer "Vcc" (solid, remove dead copper, pour order 18): 170.316,62.297 170.366,62.247 170.366,45.457 165.54,45.457 165.217,45.127 165.067,44.975 165.067,38.421 167.829,38.421 168.053,38.193 168.003,38.142 168.003,37.101 162.804,37.101 162.43,36.72 162.356,36.643 162.356,27.093 159.818,27.093 159.495,27.423 159.495,62.17 159.595,62.272
UB+ on Top Layer "Vin" (solid, remove dead copper, pour order 19): 185.174,27.169 177.89,27.169 177.89,70.588 177.859,70.832 185.174,70.832
GND on Top Layer "Gnd" (solid, remove dead copper, pour order 17): 177.529,39.544 170.315,39.544 170.265,39.595 170.265,42.612 168.207,42.612 168.182,42.587 168.182,36.805 162.797,36.805 162.695,36.704 162.67,36.679 162.67,27.144 177.326,27.144 177.529,27.347
NetC1_2 on Top Layer "Fb" (solid, remove dead copper, pour order 13): 168.944,42.993 168.944,44.949 168.842,45.051 168.817,45.025 165.515,45.025 165.515,40.961 165.54,40.936 167.953,40.936 167.953,43.019
NetC1_1 on Top Layer "Vsw" (solid, pour order 12): 171.593,40.86 171.593,42.892 171.519,42.968 169.401,42.968 169.401,44.975 169.45,45.025 170.633,45.025 170.633,62.145 170.534,62.247 170.608,62.323 177.529,62.323 177.529,41.139 177.307,40.911
GND on Bottom Layer "Ground" (none, remove dead copper, pour order 7): 7.493,138.938 180.213,138.938 180.213,122.682 180.34,122.555 189.23,122.555 189.23,19.05 180.34,19.05 180.34,0.635 6.985,0.635 6.985,19.05 0.635,19.05 0.635,122.555 6.985,122.555 6.985,138.938

## Keep-outs
Keep-Out Layer:
  the board outline again, w0.3

## Other copper
Top Layer:
  text "PC-Remote Schaltbox V1.0" at 107.594,158.96 h2.5
  text "Modell Renault" at 107.569,154.559 h2.5
  text "Schleissheimer GmbH" at 107.823,150.241 h2.5
  text "08-12-2014" at 107.823,146.05 h2.5

## Dimensions
0.033,18.67 to 6.733,-0.03 on Mechanical 1
6.733,-0.03 to 0.033,18.67 on Mechanical 1

## Text inside footprints (layer, text, board x,y; h text height)
X1: Top Overlay "10" at 56.261,128.143 h1.27; Top Overlay "9" at 56.261,125.603 h1.27; Top Overlay "1" at 42.545,125.603 h1.27; Top Overlay "2" at 42.037,128.143 h1.27
X7: Top Overlay "10" at 16.002,116.332 h1.27 r180; Top Overlay "9" at 16.002,118.872 h1.27 r180; Top Overlay "1" at 29.718,118.872 h1.27 r180; Top Overlay "2" at 30.226,116.332 h1.27 r180
X8: Top Overlay "10" at 73.533,128.143 h1.27; Top Overlay "9" at 73.533,125.603 h1.27; Top Overlay "1" at 59.817,125.603 h1.27; Top Overlay "2" at 59.309,128.143 h1.27
X16: Top Overlay "1" at 21.336,21.082 h1.2
X18: Top Overlay "1" at 21.336,25.527 h1.2
X19: Top Overlay "1" at 126.873,41.275 h1.2 r270
X21: Top Overlay "1" at 118.618,81.28 h1.2 r90
X22: Top Overlay "1" at 120.904,120.523 h1.2
X25: Top Overlay "1" at 58.039,81.534 h1.2
X26: Top Overlay "1" at 81.153,81.407 h1.2
X27: Top Overlay "1" at 69.469,81.534 h1.2